# Altium PCB TANK_PCB (DESKTOP-IFENSDK's conflicted copy 2022-05-19).PcbDoc
Units mil, origin at the board's own origin, x right, y up, seen from the top; angles counter-clockwise.
Board outline 2120 x 2295 mil, 2 copper layers (Top Layer, Bottom Layer); 13 components, 16 nets, 86 pads, 0 vias.
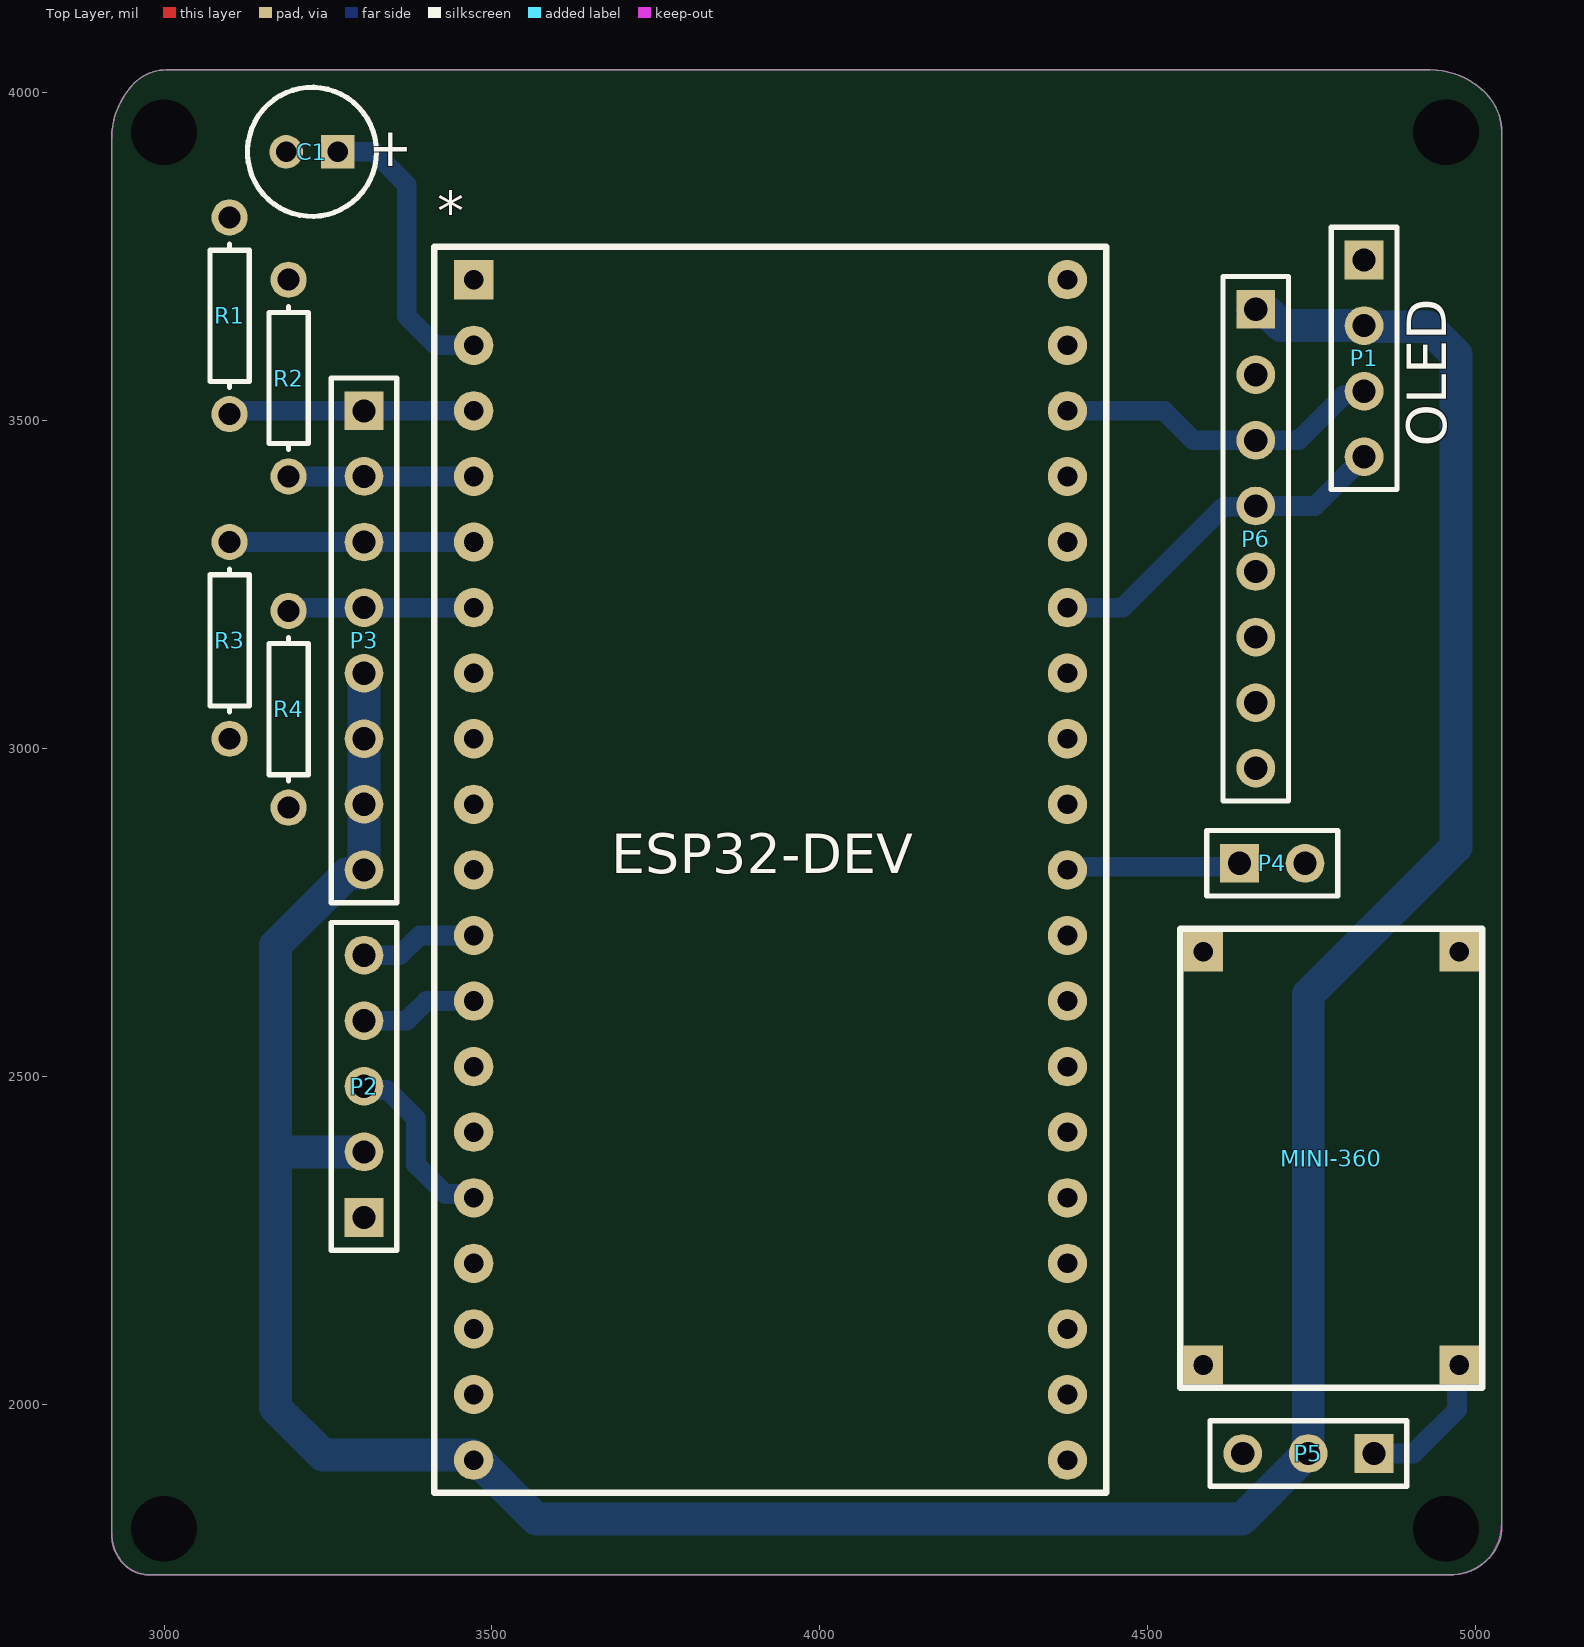
[diagram p0: Top Layer view]
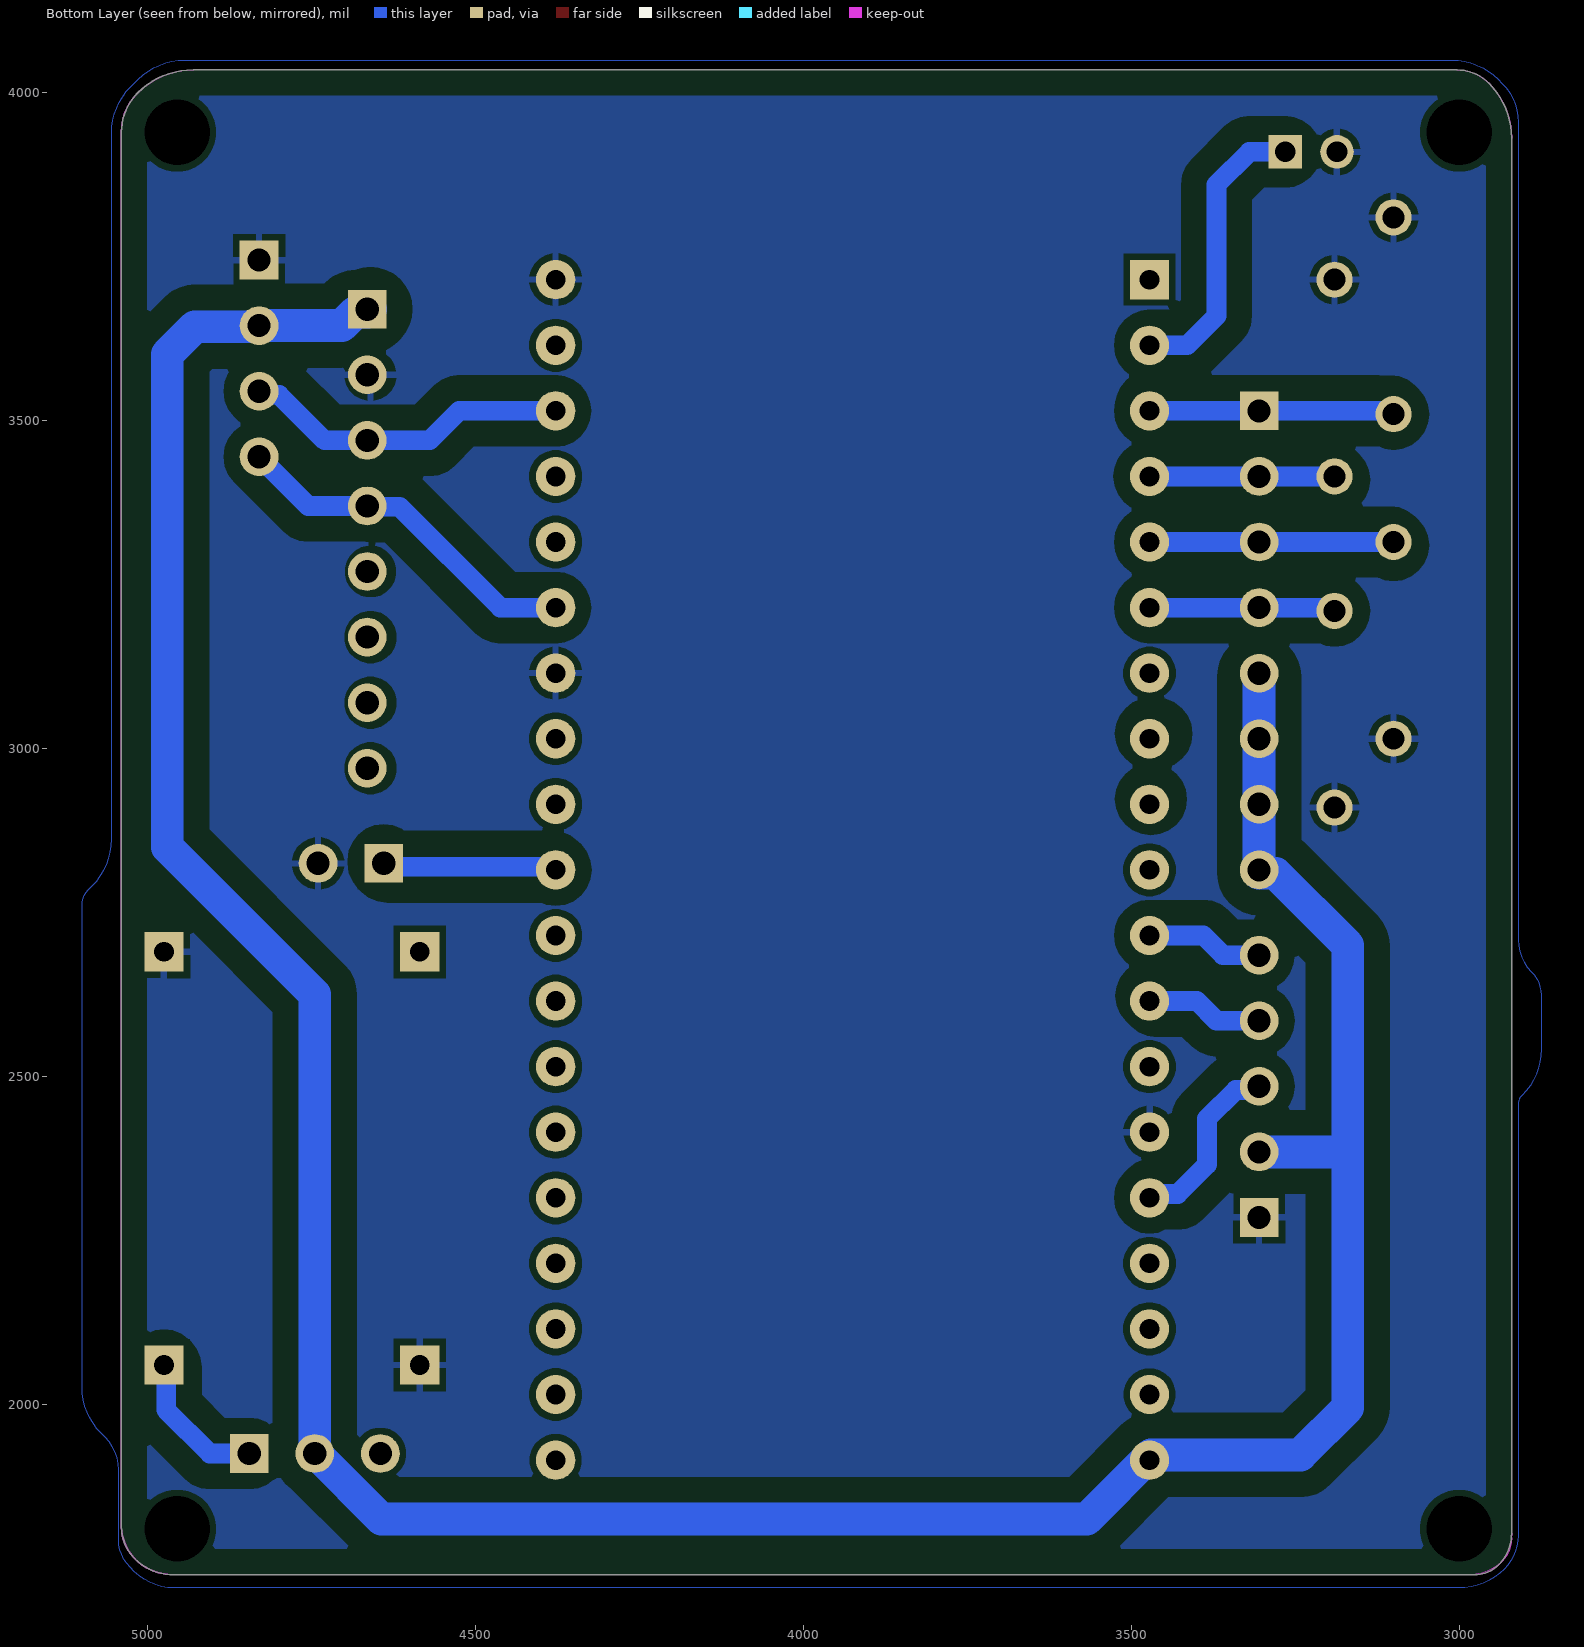
[diagram p1: Bottom Layer view, seen from below]

## Layer stack, top to bottom
Top Solder: solder mask 0.4, Solder Resist, Dk 3.5
Top Layer: signal copper 1.4
Dielectric 1: dielectric 12.6, FR-4, Dk 4.8
Bottom Layer: signal copper 1.4
Bottom Solder: solder mask 0.4, Solder Resist, Dk 3.5

## Board outline
2940,1755 cw(c2988.28,1803.28) 2920,1803.28 2920,3930.5 cw(c3039.5,3930.5) 2955,4015 cw(c3003.28,3966.72) 3003.28,4035 4930.5,4035 cw(c4930.5,3915.5) 5015,4000 cw(c4954.64,3939.64) 5040,3939.64 5040,1813.28 cw(c4971.72,1813.28) 5020,1765 cw(c4959.64,1825.36) 4959.64,1740 2976.21,1740 cw(c2976.21,1791.21)

## Design rules (kind name [scope] priority, off if disabled: settings)
Clearance [All] p1: gap=10 ignorepadtopadclearanceinfootprint=FALSE except(0: SMDPad-Hole THPad-Hole Via-Hole Fill-Hole Poly-Hole Region-Hole Text-Hole; 5: Arc-Hole Track-Hole; 39.37: Arc-Arc Arc-Track Arc-Fill Arc-Poly Arc-Region Track-Track Track-Fill Track-Poly Track-Region)
PolygonConnect [All] p1: connectstyle=Relief reliefconductorwidth=10 reliefentries=4 polygonreliefangle="90 Angle" airgapwidth=10
RoutingVias [All] p1: holewidth=28 width=50 viastyle="Through Hole" minholewidth=28 minwidth=50 maxholewidth=28 maxwidth=50
SolderMaskExpansion [All] p1: expansion=4 istentingtop=FALSE
Width [All] p1: maxlimit=50 minlimit=30 preferedwidth=40 minimp=50.000000 maximp=50.000000 favimp=50.000000
30 further rules are at their usual default settings.

## Components (designator, comment, footprint, x,y, rotation, side; value= is the part's Value field where it differs from the comment)
* "ESP32-WROOM-32D DEV_BOARD" PCBComponent_1 3472.16,3715 r0 top
C1 "ECA1HM100" CAPPR55-200-1100X500X1200 3225.63,3910 r180 top value=10µF
MINI-360 "MINI-360" MINI-360 4735,2245 r90 top
P1 "OLED" HDR1X4 4830,3745 r270 top
P2 "Joystick" HDR1X5 3305,2285 r90 top
P3 "FING" HDR1X8 3305,3515 r270 top
P4 "VIB" HDR1X2 4640,2825 r0 top
P5 "SWITCH" HDR1X3 4845,1925 r180 top
P6 "GY-521" HDR1X8 4665,3670 r270 top
R1 "" AXIAL-0.3 3100,3660 r270 top value=100K
R2 "" AXIAL-0.3 3190,3565 r270 top value=100K
R3 "" AXIAL-0.3 3100,3165 r90 top value=100K
R4 "" AXIAL-0.3 3190,3060 r90 top value=100K

## Footprints (in the part's own frame and the unit in brackets; to place one, negate y for a bottom-side part, rotate by r counter-clockwise, add the part's x,y. Pads: shape width x height; smd on the part's side, far side on the other; paste and mask are expansions set on the pad)
AXIAL-0.3 [mm] "Axial Device, Thru-Hole; 2 Leads; 0.3 in Pin Spacing"
  round 1.4 hole 0.85: 1(-3.81,0) 2(3.81,0)
  silkscreen extent -2.77,-0.76 2.77,0.76
CAPPR55-200-1100X500X1200 [mm] "THD, 2-Leads, Dia 5mm, Pin Spacing 2mm"
  rect 1.3x1.3 hole 0.8: 1(-1,0)
  round 1.3 hole 0.8: 2(1,0)
  silkscreen extent -2.5,-2.5 2.5,2.5, body extent -2.5,-2.5 2.45,2.5, height 12
HDR1X2 [mm] "Connector; Header; 2 Position"
  rect 1.5x1.5 hole 0.9: 1(0,0)
  round 1.5 hole 0.9: 2(2.54,0)
  silkscreen extent -1.27,-1.27 3.81,1.27
HDR1X3 [mm] "Connector; Header; 3 Position"
  rect 1.5x1.5 hole 0.9: 1(0,0)
  round 1.5 hole 0.9: 2(2.54,0) 3(5.08,0)
  silkscreen extent -1.27,-1.27 6.35,1.27
HDR1X4 [mm] "Connector; Header; 4 Position"
  rect 1.5x1.5 hole 0.9: 1(0,0)
  round 1.5 hole 0.9: 2(2.54,0) 3(5.08,0) 4(7.62,0)
  silkscreen extent -1.27,-1.27 8.89,1.27
HDR1X5 [mm] "Connector; Header; 5 Position"
  rect 1.5x1.5 hole 0.9: 1(0,0)
  round 1.5 hole 0.9: 2(2.54,0) 3(5.08,0) 4(7.62,0) 5(10.16,0)
  silkscreen extent -1.27,-1.27 11.43,1.27
HDR1X8 [mm] "Connector; Header; 8 Position"
  rect 1.5x1.5 hole 0.9: 1(0,0)
  round 1.5 hole 0.9: 2(2.54,0) 3(5.08,0) 4(7.62,0) 5(10.16,0) 6(12.7,0) 7(15.24,0) 8(17.78,0)
  silkscreen extent -1.27,-1.27 19.05,1.27
MINI-360 [mil]
  rect 60x60 hole 30: 1(-185,150) 2(445,150) 3(-185,-240) 4(445,-240)
  silkscreen extent -220,-275 480,185, body extent -224,-281 485,191, height 88
PCBComponent_1 [mil]
  rect 60x60 hole 30: 1(0,0)
  round 60 hole 30: 2(0,-100) 3(0,-200) 4(0,-300) 5(0,-400) 6(0,-500) 7(0,-600) 8(0,-700) 9(0,-800) 10(0,-900) 11(0,-1000) 12(0,-1100) 13(0,-1200) 14(0,-1300) 15(0,-1400) 16(0,-1500) 17(0,-1600) 18(0,-1700) 19(0,-1800) 20(905.51,-1800) 21(905.51,-1700) 22(905.51,-1600) 23(905.51,-1500) 24(905.51,-1400) 25(905.51,-1300) 26(905.51,-1200) 27(905.51,-1100) 28(905.51,-1000) 29(905.51,-900) 30(905.51,-800) 31(905.51,-700) 32(905.51,-600) 33(905.51,-500) 34(905.51,-400) 35(905.51,-300) 36(905.51,-200) 37(905.51,-100) 38(905.51,0)
  silkscreen extent -60,-1850 965,50

## Part data
C1: library part CMP-001-00025-7, "Aluminum Electrolytic Capacitor, 10 uF, +/- 20%, 50 V, -40 to 85 degC, 2-Pin THD, RoHS, Bulk", Capacitor Type=Electrolytic, Case/Package=Radial, Manufacturer=Panasonic, Max Operating Temperature=85°C, Min Operating Temperature=-40°C, Package Description="2-Pin Radial Lead, Dia 5 mm, Height 12 mm", Package Quantity=200, Package Reference=CAPPR55-200-1100X500X1200, Ripple Current=65mA, Tolerance=20%, Voltage Rating=50V, Datasheet URL=https://industrial.panasonic.com/cdbs/www-data/pdf/RDF0000/ABA0000C1218.pdf, Datasheet Version="Rev. 05, 10/2016", Diameter=5mm, Lead Pitch=2mm, Manufacturer URL=http://www.panasonic.com/, Mounting Technology=TH, Packaging=Bulk, Pins=2, Ripple Current (AC)=65mA, RoHS Compliant=True
MINI-360: library part CMP-004-000006-1, Design Item ID=MINI-360, Source=MINI-360.SchLib
P1: library part "Header 4", "Header, 4-Pin", LatestRevisionDate=17-Jul-2002, LatestRevisionNote="Re-released for DXP Platform.", Publisher="Altium Limited"
P2: library part "Header 5", "Header, 5-Pin", LatestRevisionDate=17-Jul-2002, LatestRevisionNote="Re-released for DXP Platform.", Publisher="Altium Limited"
P3 P6: library part "Header 8", "Header, 8-Pin", LatestRevisionDate=17-Jul-2002, LatestRevisionNote="Re-released for DXP Platform.", Publisher="Altium Limited"
P4: library part "Header 2", "Header, 2-Pin", LatestRevisionDate=17-Jul-2002, LatestRevisionNote="Re-released for DXP Platform.", Publisher="Altium Limited"
P5: library part "Header 3", "Header, 3-Pin", LatestRevisionDate=17-Jul-2002, LatestRevisionNote="Re-released for DXP Platform.", Publisher="Altium Limited"
R1 R2 R3 R4: library part Res1, "Resistor", LatestRevisionDate=17-Jul-2002, LatestRevisionNote="Re-released for DXP Platform.", PackageDescription="Axial Device, Thru-Hole; 2 Leads; 0.3 in Pin Spacing", PackageReference=AXIAL-0.3, Published=8-Jun-2000, Publisher="Altium Limited"

## Free pads (board coordinates)
  round 88.74 hole 100: 2(4955,3940) 3(3000,3940) 4(3000,1810) 5(4955,1810)

## Nets (pads, with @x,y where several pads share a name; then routed paths per layer and width w, separated by ;. In a path a pad name is that pad's centre, name@x,y a point inside that pad or via, vN(x,y) a via of type N, cw(c..) or ccw(c..) an arc to the next point about the centre after c; other vN are vias at no path point)
3V3: *.1
+5: *.19 P1.2 P2.2 P3.5 P3.6 P3.7 P3.8 P5.2 P6.1 | length 5111.5
  Bottom Layer w50: P3.8@3302.55,2813.27 3300.82,2813.27 3297.55,2810 3280,2810 3170,2700 3170,2390 ; P2.2 3304.87,2384.87 3175.13,2384.87 3170,2390 ; P3.8@3305,2810 P3.5@3305,3110 ; P6.1@4660,3670 4664.53,3665.47 4683.34,3665.47 4703.82,3645 P1.2@4827.55,3645 ; P5.2 4743.33,1925 4643.33,1825 3567.95,1825 3470,1922.95 3242.05,1922.95 3170,1995 3170,2390 ; P5.2@4745,1927.45 4745,2625 4970,2850 4970,3601.32 4928.05,3643.27 4831.73,3643.27 P1.2
GND: *.14 *.32 *.38 C1.2 MINI-360.1 MINI-360.4 P1.1 P2.1 P4.2 P6.2 R1.1 R2.1 R3.1 R4.1
IO5: *.29 P4.1 | length 271.5
  Bottom Layer w30: *.29 4382.67,2820 4635,2820 P4.1 ; P4.1@4636.48,2826.48 P4.1@4640,2830
IO13: *.15 P2.3 | length 278.6
  Bottom Layer w30: P2.3 3310.56,2479.44 3340.56,2479.44 3384.37,2435.63 3384.37,2365.63 3429.26,2320.74 3466.41,2320.74 *.15
IO14: *.12 P2.4 | length 180.7
  Bottom Layer w30: P2.4 3370,2585 3400,2615 3462.05,2615 *.12@3470,2622.95
IO21: *.33 P1.4 P6.4 | length 547.6
  Bottom Layer w30: *.33 4462.05,3215 4615.82,3368.78 4658.78,3368.78 4660,3370 4755,3370 P1.4
IO22: *.36 P1.3 P6.3 | length 502
  Bottom Layer w30: *.36 4525,3515 4570,3470 4660,3470 4730,3470 4799.44,3539.44 4824.44,3539.44 P1.3
IO27: *.11 P2.5 | length 179.6
  Bottom Layer w30: P2.5 3360,2685 3390,2715 *.11
IO34: *.5 P3.3 R3.2 | length 374.2
  Bottom Layer w30: R3.2@3100,3310 3104.81,3314.81 3122.57,3314.81 3122.76,3315 P3.3 *.5
IO35: *.6 P3.4 R4.2 | length 284.2
  Bottom Layer w30: R4.2 3194.81,3214.81 3217.57,3214.81 3217.76,3215 P3.4 *.6
Net*_2: *.2 C1.1 | length 446.5
  Bottom Layer w30: C1.1 3320,3910 3370,3860 3370,3660 3415,3615 *.2
NetMINI-360_3: MINI-360.3 P5.1 | length 224
  Bottom Layer w30: P5.1 4905,1925 4971.63,1991.63 4971.63,2056.63 MINI-360.3
S_VN: *.4 P3.2 R2.2 | length 285.2
  Bottom Layer w30: R2.2@3190,3410 3194.81,3414.81 3217.57,3414.81 3217.76,3415 P3.2 *.4@3473.14,3415
VCC: MINI-360.2
VP: *.3 P3.1 R1.2 | length 389.8
  Bottom Layer w30: R1.2 3104.81,3514.81 3122.57,3514.81 3122.76,3515 P3.1 P3.1@3310,3515 ; P3.1@3305,3510 P3.1@3310,3515 ; *.3@3463.99,3516.94 *.3@3470,3522.95 ; *.3 P3.1@3310,3515
pads on no net: *.7 *.8 *.9 *.10 *.13 *.16 *.17 *.18 *.20 *.21 *.22 *.23 *.24 *.25 *.26 *.27 *.28 *.30 *.31 *.34 *.35 *.37 P5.3 P6.5 P6.6 P6.7 P6.8
copper on no net: | length 8.5
  Bottom Layer w30: 3461.5,3022.95 3470,3022.95

## Polygon pours and split planes (outlines as drawn)
GND on Bottom Layer (solid, pour order 7): 3003.28,4035 ccw(c3003.28,3966.72) 2955,4015 2949.29,4009.29 ccw(c3020,3938.58) 2920,3938.58 2920,1810.36 ccw(c3005.36,1810.36) 2945,1750 ccw(c2969.14,1774.14) 2969.14,1740 4965,1740 ccw(c4965,1812.43) 5016.21,1761.21 5025,1770 ccw(c4988.79,1806.21) 5040,1806.21 5040,3933.58 ccw(c4940,3933.58) 5010.71,4004.29 5005,4010 ccw(c4944.64,3949.64) 4944.64,4035 4880,4035
GND on Bottom Layer "NONET_L02_P000" (solid, shelved, pour order 0): 3011.42,4050 ccw(c3011.42,3950) 2940.71,4020.71 2934.64,4014.64 ccw(c2994.14,3955.15) 2910,3955.15 2910,2708.28 cw(c2841.72,2708.28) 2890,2660 ccw(c2926.21,2623.79) 2875,2623.79 2875,2541.42 ccw(c2975,2541.42) 2904.29,2470.71 2905,2470 cw(c2892.93,2457.93) 2910,2457.93 2910,1800 ccw(c2982.43,1800) 2931.21,1748.79 ccw(c3000.71,1818.28) 3000.71,1720 4959.64,1720 ccw(c4959.64,1805.36) 5020,1745 5026.74,1751.74 ccw(c4984.51,1793.98) 5044.24,1793.98 5044.24,1900.38 cw(c5113.91,1900.38) 5064.64,1949.64 5070.71,1955.71 ccw(c5000,2026.42) 5100,2026.42 5100,2761.36 ccw(c5067.07,2761.36) 5090.36,2784.64 5084.29,2790.71 cw(c5155,2861.42) 5055,2861.42 5055,3938.58 ccw(c4955,3938.58) 5025.71,4009.29 5014.29,4020.71 ccw(c4943.58,3950) 4943.58,4050 4936.01,4050

## Keep-outs
Keep-Out Layer:
  lines w0.04: 2920,1803.28 ccw(c2988.28,1803.28) 2940,1755 ; 2920,1803.28 ccw(c2988.28,1803.28) 2940,1755 ; 2920,1803.28 2920,3930.5 ; 2920,1803.28 2920,3930.5 ; 2920,3930.5 cw(c3039.5,3930.5) 2955,4015 ; 2920,3930.5 cw(c3039.5,3930.5) 2955,4015 ; 2920,3930.5 cw(c3039.5,3930.5) 2955,4015 ; 2920,3930.5 2920,1796.21 ccw(c2971.21,1796.21) 2935,1760 ccw(c2983.28,1808.28) 2983.28,1740 4966.72,1740 ccw(c4966.72,1808.28) 5015,1760 ccw(c4954.64,1820.36) 5040,1820.36 5040,3940.15 ccw(c4955.86,3940.15) 5015.36,3999.64 ccw(c4930,3914.29) 4930,4035 3003.28,4035 ; 2940,1755 ccw(c2976.21,1791.21) 2976.21,1740 ; 2940,1755 ccw(c2976.21,1791.21) 2976.21,1740 ; 2955,4015 cw(c3003.28,3966.72) 3003.28,4035 ; 2955,4015 cw(c3003.28,3966.72) 3003.28,4035 ; 2955,4015 cw(c3003.28,3966.72) 3003.28,4035 ; 2976.21,1740 4959.64,1740 ; 2976.21,1740 4959.64,1740 ; 3003.28,4035 4930.5,4035 ; 3003.28,4035 4930.5,4035 ; 4930.5,4035 cw(c4930.5,3915.5) 5015,4000 ; 4930.5,4035 cw(c4930.5,3915.5) 5015,4000 ; 4959.64,1740 ccw(c4959.64,1825.36) 5020,1765 ; 4959.64,1740 ccw(c4959.64,1825.36) 5020,1765 ; 5015,4000 cw(c4954.64,3939.64) 5040,3939.64 ; 5015,4000 cw(c4954.64,3939.64) 5040,3939.64 ; 5020,1765 ccw(c4971.72,1813.28) 5040,1813.28 ; 5020,1765 ccw(c4971.72,1813.28) 5040,1813.28 ; 5040,1813.28 5040,3939.64 ; 5040,1813.28 5040,3939.64

## Silkscreen, mask and mechanical layers (free items; w line width, h text height)
Mechanical 1:
  lines w10: 2920,1803.28 ccw(c2988.28,1803.28) 2940,1755 ccw(c2976.21,1791.21) 2976.21,1740 4959.64,1740 ccw(c4959.64,1825.36) 5020,1765 ccw(c4971.72,1813.28) 5040,1813.28 5040,3939.64 ccw(c4954.64,3939.64) 5015,4000 ccw(c4930.5,3915.5) 4930.5,4035 3065,4035 3003.28,4035 ccw(c3003.28,3966.72) 2955,4015 ccw(c3039.5,3930.5) 2920,3930.5 2920,1803.28

## Text inside footprints (layer, text, board x,y; h text height)
*: Top Overlay "ESP32-DEV" at 3682.16,2810 h60
C1: Top Overlay "+" at 3379.49,3939.02 h59.06 r180
MINI-360: Mechanical 1 "IN+" at 4990,2110 h39.37 r90; Mechanical 1 "IN-" at 4610,2110 h39.37 r90; Mechanical 1 "OUT+" at 4990,2500 h39.37 r90; Mechanical 1 "OUT-" at 4605,2495 h39.37 r90